# EAGLE board SHIELD1.12 (EAGLE 7.6.0)

Size 60.63 x 53.33 mm. Coordinates in mm from the lower left corner, seen from the top.
Outline: 0,0 60.63,0 60.63,53.33 0,53.33 0,0
Copper layers (1*16): Top 0.035mm / dielectric 1.5mm / Bottom 0.035mm
Design rules "default": minimum track width 10mil, minimum drill 24mil, track to track 8mil, track to pad 8mil, pad to pad 8mil, via to via 8mil, smd to smd 8mil, copper to edge 40mil, drill to drill 8mil, minimum pad ring 10mil, minimum via ring 8mil, stop-mask expansion 4mil, vias tented up to drill 0mil, thermal gap 10mil

## Footprints (pad centres in the part's own frame; a part is rotated, then mirrored left to right if it is on the bottom)
UNO_R3_SHIELD = drill 1.016 pad 1.88: 3.3V 24.13,-2.54; 5V 24.13,0; A0 24.13,12.7; A1 24.13,15.24; A2 24.13,17.78; A3 24.13,20.32; A4 24.13,22.86; A5 24.13,25.4; AREF -24.13,-13.97; D2 -24.13,20.32; D3 -24.13,17.78; D4 -24.13,15.24; D5 -24.13,12.7; D6 -24.13,10.16; D7 -24.13,7.62; D8 -24.13,3.81; D9 -24.13,1.27; D10 -24.13,-1.27; D11 -24.13,-3.81; D12 -24.13,-6.35; D13 -24.13,-8.89; GND@0 24.13,2.54; GND@1 24.13,5.08; GND@2 -24.13,-11.43; IOREF 24.13,-7.62; NC 24.13,-10.16; RES 24.13,-5.08; RX -24.13,25.4; SCL -24.13,-19.05; SDA -24.13,-16.51; TX -24.13,22.86; VIN 24.13,7.62
LED_5MM = drill 0.813 pad 1.88: A -1.27,0; K 1.27,0
AXIAL-0.3 = drill 0.9 pad 1.88: P$1 -3.81,0; P$2 3.81,0
EDG-04 = drill 0.813 long: 1 -3.81,-3.81; 2 -1.27,-3.81; 3 1.27,-3.81; 4 3.81,-3.81; 5 3.81,3.81; 6 1.27,3.81; 7 -1.27,3.81; 8 -3.81,3.81
22-23-2061 = drill 1 long: 1 -6.35,0; 2 -3.81,0; 3 -1.27,0; 4 1.27,0; 5 3.81,0; 6 6.35,0

## Placement (x,y rotation side)
B1  ARDUINO_UNO_R3_SHIELDBASIC  [UNO_R3_SHIELD]  29.21,26.67 270 top
D3  [LED_5MM]  35.56,25.4 180 top
R1  1k  [AXIAL-0.3]  34.29,40.64 270 top
R2  2.2k  [AXIAL-0.3]  26.67,30.48 180 top
R3  10k  [AXIAL-0.3]  50.8,24.13 270 top
R4  10k  [AXIAL-0.3]  43.18,24.13 270 top
R5  10k  [AXIAL-0.3]  30.48,40.64 270 top
R6  10k  [AXIAL-0.3]  46.99,24.13 270 top
R7  1k  [AXIAL-0.3]  38.1,40.64 90 top
SW2  DIP  [EDG-04]  45.72,39.37 180 top
X1  [22-23-2061]  17.78,40.64 180 top

## Library data of the parts
B1 = SparkFun-Boards
D3 = SparkFun-LED
R1 R2 R7 = SparkFun-Resistors; PROD_ID: RES-12182
R3-R6 = SparkFun-Resistors; PROD_ID: RES-12183
SW2 = special
X1 = con-molex; MF: MOLEX; MPN: 22-23-2061; OC_FARNELL: 1462922; OC_NEWARK: 27C1933

## Nets
5V: B1.GND@1 SW2.5 SW2.6 SW2.7 SW2.8
D2: B1.D2 R3.P$1 SW2.1
D3: B1.D3 R4.P$1 SW2.2
GND: B1.GND@0 D3.K R2.P$1 X1.4
LED: D3.A R7.P$1
N$1: B1.D5 R6.P$1 SW2.4
N$2: B1.RX R1.P$1
N$3: B1.D4 R5.P$1 SW2.3
N$4: B1.TX X1.2
N$5: R1.P$2 R2.P$2 X1.3
N$6: B1.5V R3.P$2 R4.P$2 R5.P$2 R6.P$2 X1.5
N$10: B1.D6 R7.P$2

## Tracks (layer width: path | path; a pad name or v marks a point on that pad's centre or on a via)
5V  (4 unrouted)
D2  (2 unrouted)
D3  (2 unrouted)
GND  (3 unrouted)
LED  (1 unrouted)
N$1  (2 unrouted)
N$2  (1 unrouted)
N$3  (2 unrouted)
N$4  (1 unrouted)
N$5  (2 unrouted)
N$6  (5 unrouted)
N$10  (1 unrouted)